# Altium PCB ESP32DOWDQ6.PcbDoc (part 2 of 2)
Units mm, origin at the board's own origin, x right, y up, seen from the top; angles counter-clockwise.
Board outline 70 x 35 mm, 2 copper layers (Top Layer, Bottom Layer); 86 components, 85 nets, 513 pads, 4 vias.
Unrouted connection lines stored in the file: 70.
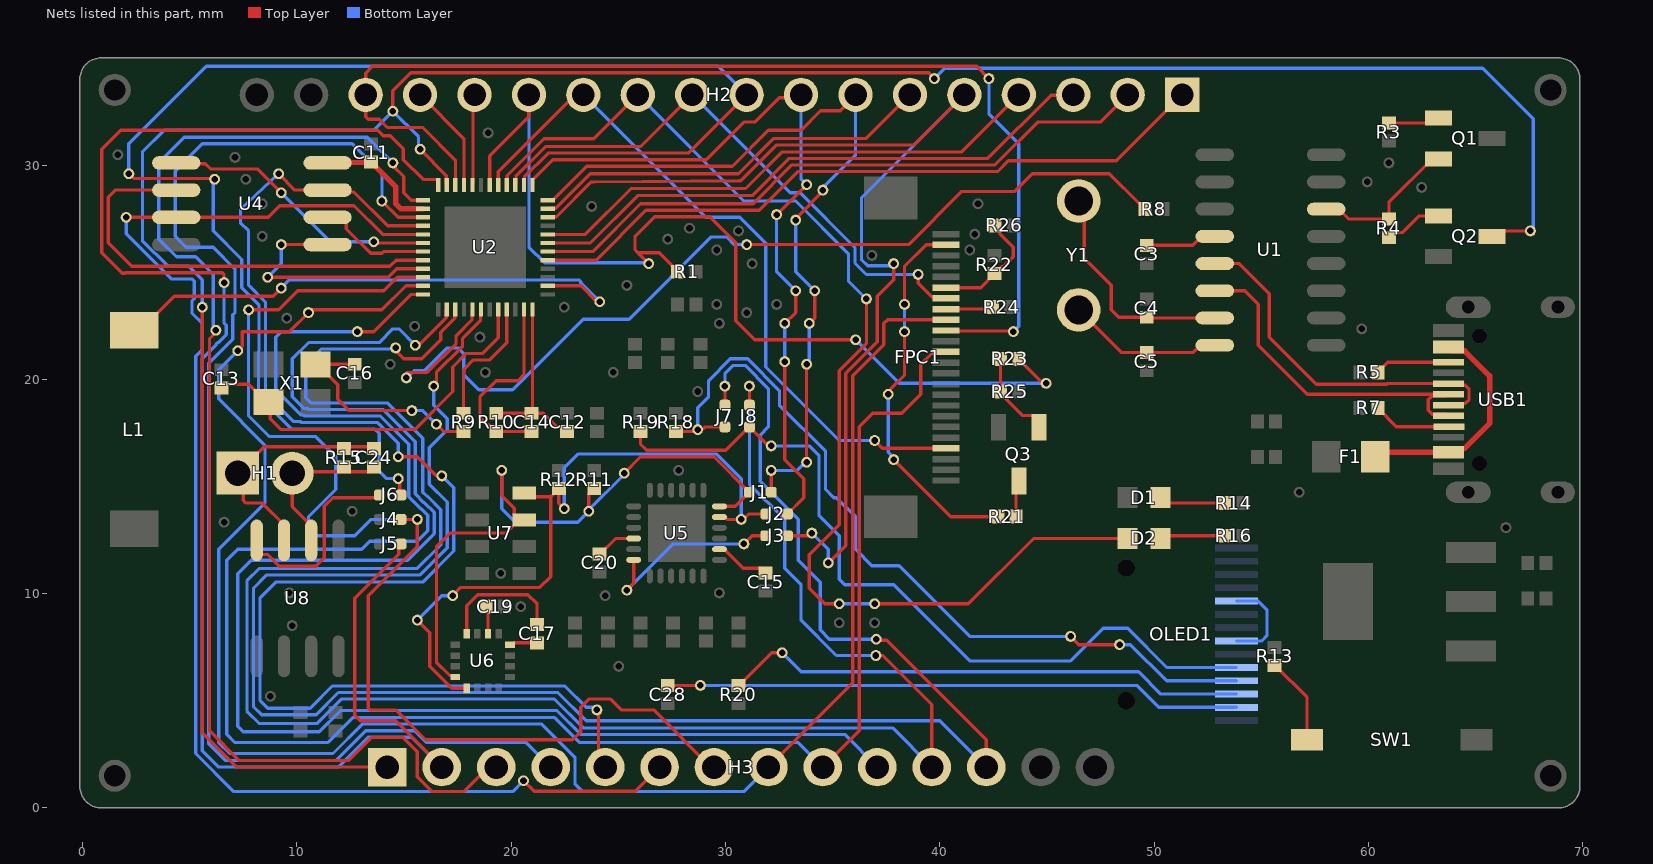
[diagram p2: the nets of this part, all layers, seen from the top]

## Via types
v1: diameter 0.61, hole 0.305, Top Layer to Bottom Layer, tented both sides, 4 vias

## Nets (pads, with @x,y where several pads share a name; then routed paths per layer and width w, separated by ;. In a path a pad name is that pad's centre, name@x,y a point inside that pad or via, vN(x,y) a via of type N, cw(c..) or ccw(c..) an arc to the next point about the centre after c; other vN are vias at no path point) (continued)
GPIO0: H3.1 pad.161 pad.183 pad.192 pad.205 pad.206 Q2.3 U2.23 | length 117.9
  Top Layer w0.152: pad.183@5.588,23.368 5.588,3.506 7.189,1.905 H3.1@14.224,1.905 ; pad.205@14.478,32.512 14.478,33.459 15.322,34.303 39.484,34.303 pad.206@39.624,34.163 ; pad.161@15.748,30.734 16.972,29.51 16.972,29.093 U2.23@16.996,29.07 ; Q2.3@65.766,26.67 66.02,26.924 pad.192@67.564,26.924
  Bottom Layer w0.152: pad.183@5.588,23.368 5.588,24.638 4.953,25.273 3.987,25.273 2.794,26.466 2.794,30.607 3.81,31.623 13.589,31.623 14.452,32.486 pad.205@14.478,32.512 15.68,31.31 15.68,30.802 pad.161@15.748,30.734 ; pad.206@39.751,34.036 40.234,34.519 65.329,34.519 67.691,32.156 67.691,27.051 pad.192@67.564,26.924
GPIO2: FPC1.10 H2.16 pad.193 pad.194 U2.22 | length 53.3
  Top Layer w0.152: U2.22@17.396,29.07 17.396,30.229 15.875,31.75 14.224,31.75 13.843,32.131 13.335,32.131 13.208,32.258 H2.16@13.208,33.274 13.208,34.29 13.525,34.607 41.72,34.607 pad.193@42.291,34.036 ; FPC1.10@40.294,22.279 40.321,22.252 43.407,22.252 pad.194@43.434,22.225
  Bottom Layer w0.152: pad.193@42.291,34.036 42.291,32.385 43.688,30.988 43.688,22.479 pad.194@43.434,22.225
GPIO4: H3.2 J5.2 pad.187 U2.24 | length 77.9
  Top Layer w0.152: pad.187@6.604,24.511 6.604,24.879 6.515,24.968 1.981,24.968 1.968,24.955 1.842,24.955 0.889,25.908 0.889,30.734 1.778,31.623 13.775,31.623 14.029,31.369 14.351,31.369 14.961,30.759 14.961,30.251 15.886,29.326 16.572,29.326 16.596,29.302 U2.24@16.596,29.07 ; J5.2@14.859,12.319 14.757,12.217 14.757,11.836 12.7,9.779 12.7,4.318 12.954,4.064 14.619,4.064 16.764,1.919 H3.2@16.764,1.905
  Bottom Layer w0.152: pad.187@6.604,24.511 6.604,22.627 6.706,22.525 6.706,22.089 6.334,21.717 6.312,21.717 6.223,21.628 6.223,21.59 5.588,20.955 5.588,2.667 6.35,1.905 11.938,1.905 13.335,3.302 15.367,3.302 H3.2@16.764,1.905
GPIO5: H3.7 J4.2 pad.200 pad.201 U2.34 | length 58
  Top Layer w0.152: pad.200@7.747,23.241 9.144,23.241 10.033,24.13 14.058,24.13 14.69,24.762 U2.34@15.888,24.762 ; J4.2@14.859,13.462 pad.201@15.621,13.462 15.621,12.192 13.335,9.906 13.335,4.661 13.424,4.572 14.605,4.572 16.002,3.175 22.86,3.175 23.241,3.556 23.241,4.699 23.622,5.08 24.638,5.08 25.146,4.572 26.65,4.572 29.317,1.905 H3.7@29.464,1.905
  Bottom Layer w0.152: pad.200@7.747,23.241 7.747,18.288 8.7,17.335 10.858,17.335 11.811,16.383 11.811,14.859 10.541,13.589 10.541,13.081 10.922,12.7 12.7,12.7 13.462,13.462 pad.201@15.621,13.462
GPIO9: H3.5 pad.167 pad.209 pad.210 pad.211 U2.28 U4.7 | length 67.5
  Top Layer w0.152: pad.167@9.144,29.591 9.906,28.829 U4.7@11.43,28.829 11.521,28.738 12.664,28.738 14.24,27.162 U2.28@15.888,27.162 ; pad.209@14.732,16.383 15.621,16.383 pad.210@16.51,15.494 ; pad.211@24.003,4.572 24.071,4.504 24.071,2.218 H3.5@24.384,1.905
  Bottom Layer w0.152: pad.167@9.144,29.591 7.366,27.94 7.366,27.305 7.747,26.924 7.747,24.387 8.534,23.599 8.534,19.329 9.83,18.034 10.16,18.034 10.211,17.983 13.764,17.983 14.667,17.08 14.732,17.015 pad.209@14.732,16.383 ; pad.210@16.764,15.494 17.323,14.935 17.323,11.989 15.875,10.541 9.017,10.541 8.28,9.804 8.28,5.007 8.64,4.648 10.617,4.648 11.659,5.69 22.504,5.69 23.495,4.699 23.876,4.699 pad.211@24.003,4.572 pad.211@24.13,4.445
GPIO10: H3.6 pad.212 pad.213 U2.29 U4.3 | length 65.2
  Top Layer w0.152: pad.212@2.032,27.559 U4.3@4.37,27.559 8.661,27.559 9.205,28.103 12.664,28.103 14.005,26.762 U2.29@15.888,26.762 ; pad.213@20.574,1.27 21.068,0.776 25.795,0.776 H3.6@26.924,1.905
  Bottom Layer w0.152: pad.212@2.032,27.559 2.032,26.797 4.153,24.676 5.118,24.676 5.207,24.587 5.207,23.763 5.105,23.662 5.105,23.089 5.588,22.606 5.588,21.386 5.283,21.081 5.283,2.54 7.061,0.762 20.066,0.762 pad.213@20.574,1.27
GPIO12: H2.13 pad.196 pad.242 pad.243 R1.2 R23.1 U2.18 | length 48.4
  Top Layer w0.152: U2.18@18.996,29.07 18.996,30.426 20.815,32.245 20.815,33.261 H2.13@20.828,33.274 ; pad.196@26.416,25.4 25.908,25.908 ; R1.2@27.769,25.019 27.769,25.044 26.905,25.908 25.908,25.908 ; pad.243@36.068,21.844 31.369,21.844 30.48,22.733 30.48,26.369 29.264,27.584 26.695,27.584 25.781,26.67 25.781,26.035 25.908,25.908 ; R23.1@43.688,20.955 43.688,20.93 44.806,19.812 pad.242@44.958,19.812
  Bottom Layer w0.152: H2.13@20.828,33.274 20.828,26.162 21.556,25.434 26.382,25.434 pad.196@26.416,25.4 ; pad.243@36.068,21.844 38.1,19.812 pad.242@44.958,19.812
GPIO13: H2.14 U2.20 | length 4.2
  Top Layer w0.152: U2.20@18.196,29.07 18.22,29.093 18.22,33.206 H2.14@18.288,33.274
GPIO14: FPC1.21 H2.12 pad.241 U2.17 | length 33.2
  Top Layer w0.152: U2.17@19.396,29.07 19.396,29.683 22.987,33.274 H2.12@23.368,33.274 ; pad.241@36.957,17.145 37.323,16.779 FPC1.21@40.294,16.779
  Bottom Layer w0.152: H2.12@23.368,33.274 29.083,27.559 30.67,27.559 31.877,26.352 31.877,20.574 35.306,17.145 pad.241@36.957,17.145
GPIO15: H2.15 U2.21 | length 5.1
  Top Layer w0.152: H2.15@15.748,33.274 17.796,31.226 U2.21@17.796,29.07
GPIO16: H3.3 pad.159 pad.186 U2.25 | length 59.4
  Top Layer w0.152: pad.186@6.223,22.288 6.223,22.205 5.923,21.906 5.923,17.953 5.923,3.602 7.315,2.21 12.406,2.21 13.48,3.284 14.968,3.284 15.621,2.631 15.621,1.452 16.311,0.762 17.78,0.762 18.923,1.905 H3.3@19.304,1.905 ; pad.159@14.478,30.099 14.478,29.972 14.986,29.464 14.986,28.702 15.326,28.362 U2.25@15.888,28.362
  Bottom Layer w0.152: pad.186@6.223,22.288 6.223,22.352 6.096,22.479 6.096,24.892 5.271,25.717 4.382,25.717 3.556,26.543 3.556,30.099 4.75,31.293 13.284,31.293 pad.159@14.478,30.099
GPIO17: H3.4 pad.166 U2.27 | length 60.9
  Top Layer w0.152: pad.166@13.97,28.321 14.729,27.562 U2.27@15.888,27.562
  Bottom Layer w0.152: pad.166@13.97,28.321 13.97,29.591 12.573,30.988 5.588,30.988 4.318,29.718 4.318,26.67 4.826,26.162 6.096,26.162 7.112,25.146 7.112,23.114 7.01,23.012 7.01,21.869 5.893,20.752 5.893,2.997 6.68,2.21 11.811,2.21 13.208,3.607 15.493,3.607 16.052,3.048 20.701,3.048 H3.4@21.844,1.905
GPIO18: FPC1.9 H3.8 pad.180 pad.208 U2.35 | length 85.6
  Top Layer w0.152: pad.208@7.239,21.336 7.455,21.552 7.455,22.225 9.652,22.225 pad.180@10.541,23.114 10.668,23.241 13.97,23.241 15.091,24.362 U2.35@15.888,24.362 ; H3.8@32.004,1.905 35.936,5.837 35.936,20.167 37.389,21.62 37.389,22.606 37.562,22.779 FPC1.9@40.294,22.779
  Bottom Layer w0.152: pad.208@7.239,21.336 6.35,20.447 6.35,19.088 8.509,16.929 8.509,14.224 6.35,12.065 6.35,3.048 6.858,2.54 11.684,2.54 13.056,3.912 21.433,3.912 22.973,2.372 22.973,1.129 23.339,0.762 30.861,0.762 H3.8@32.004,1.905
GPIO19: H3.10 pad.177 U2.38 | length 70.7
  Top Layer w0.152: pad.177@15.367,21.59 pad.177@15.527,21.59 15.687,21.59 16.972,22.875 16.972,23.231 U2.38@16.996,23.254
  Bottom Layer w0.152: pad.177@15.527,21.59 14.765,22.352 14.478,22.352 13.843,21.717 10.541,21.717 9.779,20.955 9.779,19.177 10.312,18.644 10.479,18.644 10.529,18.593 14.017,18.593 15.519,17.09 15.519,14.657 15.927,14.249 15.947,14.249 16.408,13.788 16.408,12.802 15.163,11.557 7.874,11.557 7.239,10.922 7.239,3.81 7.493,3.556 11.049,3.556 12.039,4.546 22.124,4.546 23.241,3.429 35.56,3.429 H3.10@37.084,1.905
GPIO21: H3.12 J7.2 pad.174 pad.277 pad.278 U2.42 | length 92.4
  Top Layer w0.152: pad.174@16.383,19.685 16.51,19.812 16.51,20.32 17.732,21.542 17.732,21.91 18.572,22.751 18.572,23.231 U2.42@18.596,23.254 ; J7.2@29.972,18.796 pad.278@29.972,19.685 ; pad.277@37.036,7.874 37.09,7.82 37.519,7.82 42.164,3.175 H3.12@42.164,1.905
  Bottom Layer w0.152: pad.174@16.383,19.685 16.383,18.796 17.018,18.161 17.018,17.653 16.18,16.815 16.18,15.113 17.018,14.275 17.018,12.142 15.747,10.871 8.598,10.871 7.976,10.249 7.976,4.724 8.357,4.343 10.897,4.343 11.939,5.385 22.174,5.385 23.495,4.064 40.005,4.064 H3.12@42.164,1.905 ; pad.278@29.972,19.685 29.972,20.27 30.352,20.65 30.912,20.65 32.004,19.558 32.004,17.78 31.623,17.399 31.623,15.367 31.623,15.24 33.401,13.462 33.401,11.557 34.417,10.541 34.417,8.305 34.848,7.874 pad.277@37.036,7.874
GPIO22: H3.11 J8.2 pad.178 pad.276 pad.279 U2.39 | length 95
  Top Layer w0.152: 14.732,21.209 14.986,20.955 15.825,20.955 16.717,21.847 16.717,22.189 17.372,22.844 17.372,23.231 U2.39@17.396,23.254 ; J8.2@31.115,18.796 pad.279@31.115,19.685 ; pad.276@37.02,7.112 37.338,7.112 39.624,4.826 H3.11@39.624,1.905
  Bottom Layer w0.152: pad.178@14.605,21.463 14.554,21.412 11.125,21.412 10.414,20.701 10.414,19.139 10.656,18.898 14.224,18.898 15.875,17.247 15.875,14.732 16.053,14.554 16.073,14.554 16.713,13.914 16.713,12.268 15.621,11.176 8.255,11.176 7.671,10.592 7.671,4.521 8.255,3.937 10.922,3.937 12.065,5.08 22.021,5.08 23.367,3.734 37.795,3.734 H3.11@39.624,1.905 ; pad.279@31.115,19.685 31.115,15.113 32.766,13.462 32.766,11.176 33.528,10.414 33.528,8.763 35.179,7.112 pad.276@37.02,7.112
GPIO23: FPC1.12 H3.9 pad.179 U2.36 | length 92.2
  Top Layer w0.152: pad.179@12.827,22.225 13.589,22.225 15.326,23.962 U2.36@15.888,23.962 ; H3.9@34.544,1.905 36.24,3.601 36.24,17.78 36.875,18.415 38.227,18.415 39.116,19.304 39.116,20.699 39.622,21.205 40.22,21.205 FPC1.12@40.294,21.279
  Bottom Layer w0.152: pad.179@12.827,22.225 9.271,22.225 9.017,21.971 9.017,19.508 10.186,18.339 10.286,18.339 10.337,18.288 13.89,18.288 15.215,16.964 15.215,14.53 15.8,13.945 15.821,13.945 16.104,13.662 16.104,12.929 15.621,12.446 13.399,12.446 13.018,12.065 7.239,12.065 6.731,11.557 6.731,3.429 7.112,3.048 11.43,3.048 12.598,4.216 22.023,4.216 23.191,3.048 33.401,3.048 H3.9@34.544,1.905
GPIO25: H2.9 J6.2 pad.202 pad.204 pad.291 U2.14 | length 69.7
  Top Layer w0.152: pad.204@2.159,29.591 2.377,29.373 6.124,29.373 pad.291@6.159,29.337 ; pad.202@14.732,15.367 14.795,15.303 14.795,14.668 J6.2@14.859,14.605 ; U2.14@20.596,29.07 20.62,29.093 20.62,29.449 21.727,30.556 28.27,30.556 H2.9@30.988,33.274
  Bottom Layer w0.152: pad.204@2.159,29.591 2.159,30.988 5.778,34.607 29.655,34.607 H2.9@30.988,33.274 ; pad.291@6.159,29.337 6.096,29.273 6.096,26.924 7.429,25.59 7.429,24.273 8.23,23.473 8.23,21.322 8.204,21.297 8.204,19.229 9.754,17.678 13.638,17.678 13.843,17.473 13.843,15.71 14.186,15.367 pad.202@14.732,15.367
GPIO26: FPC1.7 H2.10 pad.199 U2.15 | length 26.7
  Top Layer w0.152: U2.15@20.196,29.07 20.22,29.093 20.22,29.48 21.601,30.861 26.035,30.861 H2.10@28.448,33.274 ; pad.199@38.989,24.892 38.989,24.486 39.622,23.853 40.22,23.853 FPC1.7@40.294,23.779
  Bottom Layer w0.152: H2.10@28.448,33.274 33.02,28.702 33.481,28.702 36.043,26.14 36.043,25.425 36.576,24.892 pad.199@38.989,24.892
GPIO27: D2.K H2.11 pad.244 pad.245 pad.246 U2.16 | length 54.5
  Top Layer w0.152: U2.16@19.796,29.07 19.82,29.093 19.82,29.511 21.532,31.223 23.857,31.223 H2.11@25.908,33.274 ; pad.245@35.306,9.525 34.633,9.525 33.909,10.249 33.909,11.811 35.306,13.208 35.306,20.4 36.576,21.67 pad.246@36.576,23.749 ; pad.244@36.957,9.525 41.327,9.525 44.375,12.573 D2.K@48.752,12.573
  Bottom Layer w0.152: H2.11@25.908,33.274 30.861,28.321 33.274,28.321 35.738,25.857 35.738,24.587 pad.246@36.576,23.749 ; pad.245@35.306,9.525 pad.244@36.957,9.525
GPIO32: H2.7 J1.2 pad.233 pad.235 pad.258 pad.259 pad.260 pad.261 pad.262 U2.12 | length 38.1
  Top Layer w0.152: U2.12@21.704,28.362 21.936,28.362 23.521,29.947 30.328,29.947 32.004,31.623 33.528,31.623 34.434,32.529 35.358,32.529 36.068,33.239 H2.7@36.068,33.274 ; J1.2@32.131,14.732 pad.262@32.131,15.748 ; pad.235@33.274,27.432 33.274,27.495 34.544,28.765 pad.233@34.544,28.829 ; pad.261@33.782,16.129 pad.260@33.782,20.701 ; pad.259@33.909,22.606 34.163,22.86 pad.258@34.163,24.13
  Bottom Layer w0.152: pad.262@32.131,15.748 33.344,15.748 33.725,16.129 pad.261@33.782,16.129 ; pad.235@33.274,27.432 33.274,25.019 pad.258@34.163,24.13 ; pad.260@33.782,20.701 33.909,20.828 pad.259@33.909,22.606 ; pad.233@34.417,28.829 36.068,30.48 H2.7@36.068,33.274
GPIO33: H2.8 J2.2 pad.232 pad.234 pad.255 pad.256 pad.257 U2.13 | length 35.9
  Top Layer w0.152: U2.13@20.996,29.07 20.996,29.302 21.945,30.251 29.108,30.251 30.861,32.004 31.364,32.004 32.499,33.14 33.394,33.14 H2.8@33.528,33.274 ; pad.234@32.385,27.686 pad.232@33.782,29.083 ; pad.257@32.766,20.828 32.766,16.256 33.655,15.367 33.655,14.478 J2.2@32.893,13.716 ; pad.256@32.766,22.606 33.274,23.114 pad.255@33.274,24.13
  Bottom Layer w0.152: pad.234@32.385,27.686 32.385,25.019 pad.255@33.274,24.13 ; pad.257@32.766,20.828 pad.256@32.766,22.606 ; H2.8@33.528,33.274 33.528,29.337 pad.232@33.782,29.083
GPIO34: H2.5 J3.2 pad.263 pad.264 pad.265 U2.10 | length 51.1
  Top Layer w0.152: U2.10@21.704,27.562 21.727,27.586 22.114,27.586 23.738,29.21 23.876,29.21 30.607,29.264 30.712,29.264 32.385,30.937 38.811,30.937 H2.5@41.148,33.274 ; J3.2@32.893,12.7 33.813,12.7 33.94,12.827 pad.265@34.036,12.827 ; pad.264@34.925,11.557 35.611,12.243 35.611,20.273 37.084,21.746 37.084,23.876 37.846,24.638 pad.263@37.846,25.4
  Bottom Layer w0.152: pad.265@34.036,12.827 34.798,12.065 pad.264@34.798,11.43 ; pad.263@37.846,25.4 37.744,25.298 36.63,25.298 36.347,25.581 36.347,28.473 H2.5@41.148,33.274
GPIO35: H2.6 U2.11 | length 19.1
  Top Layer w0.152: U2.11@21.704,27.962 21.727,27.986 22.083,27.986 23.688,29.591 30.607,29.591 32.258,31.242 36.576,31.242 H2.6@38.608,33.274
GPIO37: H2.2 U2.6 | length 30.1
  Top Layer w0.152: U2.6@21.704,25.962 23.803,25.962 26.035,28.194 31.292,28.194 33.1,30.002 42.575,30.002 44.577,32.004 47.498,32.004 H2.2@48.768,33.274
GPIO38: H2.3 U2.7 | length 27.4
  Top Layer w0.152: U2.7@21.704,26.362 23.695,26.362 25.908,28.575 31.242,28.575 32.974,30.307 42.245,30.307 45.199,33.261 46.215,33.261 H2.3@46.228,33.274
IMUINT: J3.1 pad.238 pad.239 U5.12 | length 9.1
  Top Layer w0.152: pad.239@25.4,10.16 25.718,10.478 U5.12@25.718,11.573 ; pad.238@30.861,12.319 31.242,12.7 J3.1@31.877,12.7
  Bottom Layer w0.152: pad.239@25.4,10.16 27.559,12.319 pad.238@30.861,12.319
IMUSCL: J2.1 pad.215 pad.216 pad.220 pad.237 R12.2 U5.23 U6.1 U7.8 | length 33.1
  Top Layer w0.152: pad.215@15.621,8.763 16.205,8.179 16.205,6.6 17.222,5.583 U6.1@17.92,5.583 ; pad.216@17.272,9.906 17.653,10.287 21.336,10.287 21.844,10.795 21.844,14.517 ; U7.8@20.615,14.692 20.79,14.517 21.844,14.517 ; pad.220@22.479,13.97 22.225,14.224 R12.2@22.225,14.898 22.2,14.898 21.976,14.674 21.976,14.649 21.844,14.517 ; U5.23@29.718,13.573 29.963,13.573 30.074,13.462 pad.237@30.734,13.462 30.83,13.462 31.084,13.716 J2.1@31.877,13.716
  Bottom Layer w0.152: pad.215@15.621,8.763 16.764,9.906 pad.216@17.018,9.906 ; pad.220@22.479,13.97 22.479,15.875 23.114,16.51 29.591,16.51 30.734,15.367 pad.237@30.734,13.462
IMUSDA: J1.1 pad.218 pad.219 pad.236 R11.2 U5.24 U6.16 U7.7 | length 32.3
  Top Layer w0.152: U6.16@17.394,6.11 17.32,6.184 17.122,6.184 16.51,6.796 16.51,12.192 17.145,12.827 19.75,12.827 U7.7@20.365,13.442 ; pad.218@19.558,15.748 19.558,14.576 20.141,13.993 20.141,13.666 U7.7@20.365,13.442 ; U7.7@20.615,13.442 U7.7@20.365,13.442 ; pad.219@23.622,13.843 23.622,14.669 23.851,14.898 R11.2@23.876,14.898 ; pad.236@25.273,15.621 26.035,16.383 29.464,16.383 J1.1@31.115,14.732 30.456,14.073 U5.24@29.718,14.073
  Bottom Layer w0.152: pad.218@19.558,15.748 19.558,13.97 20.193,13.335 23.114,13.335 pad.219@23.622,13.843 23.622,13.906 25.273,15.557 pad.236@25.273,15.621
LCD_CS: FPC1.8 R24.2 | length 2.2
  Top Layer w0.152: FPC1.8@40.294,23.279 42.368,23.279 R24.2@42.457,23.368
LEDK: FPC1.2 pad.266 pad.267 pad.268 pad.269 R21.2 | length 17.5
  Top Layer w0.152: 37.719,19.558 38.354,20.193 pad.267@38.354,22.225 ; pad.269@37.846,16.256 40.513,13.589 R21.2@42.711,13.589 ; pad.266@38.354,23.495 38.354,25.273 39.36,26.279 FPC1.2@40.294,26.279
  Bottom Layer w0.152: pad.268@37.592,19.304 37.592,16.606 37.846,16.352 pad.269@37.846,16.256 ; pad.267@38.354,22.225 pad.266@38.354,23.495
NetC3_1: C3.1 U1.4 | length 3.3
  Top Layer w0.152: C3.1@49.657,26.25 51.812,26.25 52.232,26.67 U1.4@52.832,26.67
NetC4_2: C4.2 U1.7 Y1.1 | length 10.7
  Top Layer w0.152: Y1.1@46.482,28.321 46.736,28.067 46.736,25.654 48.006,24.384 48.006,23.241 48.348,22.899 C4.2@49.657,22.899 49.696,22.86 U1.7@52.832,22.86
NetC5_2: C5.2 U1.8 Y1.2 | length 7.3
  Top Layer w0.152: Y1.2@46.482,23.241 48.47,21.253 C5.2@49.657,21.253 51.821,21.253 52.158,21.59 U1.8@52.832,21.59
NetC12_1: C12.1 C14.1 R10.2 U2.48 | length 8.5
  Top Layer w0.152: R10.2@19.304,18.415 C14.1@20.955,18.415 ; U2.48@20.996,23.254 20.996,18.456 C14.1@20.955,18.415 ; C12.1@22.581,17.565 C12.1@22.606,17.565 22.382,17.789 22.135,17.789 21.509,18.415 C14.1@20.955,18.415
NetC13_2: C13.2 U2.44 X1.1 | length 18
  Top Layer w0.152: C13.2@6.477,19.768 7.748,19.768 8.579,18.937 X1.1@8.679,18.937 8.763,18.853 8.763,18.161 9.271,17.653 15.494,17.653 17.272,19.431 17.272,20.574 17.907,21.209 18.669,21.209 19.396,21.936 U2.44@19.396,23.254
NetC14_2: C14.2 R10.1 U2.47 | length 9.2
  Top Layer w0.152: U2.47@20.596,23.254 20.596,20.215 20.32,19.939 19.304,19.939 18.542,19.177 18.542,18.229 18.884,17.886 18.958,17.886 19.279,17.565 R10.1@19.304,17.565 C14.2@20.955,17.565
NetC15_1: C15.1 U5.20 | length 2.6
  Top Layer w0.152: U5.20@29.718,12.073 29.949,12.073 30.832,11.19 31.653,11.19 C15.1@31.877,10.966
NetC16_2: C16.2 pad.172 pad.173 R9.1 X1.3 | length 10.2
  Top Layer w0.152: C16.2@12.7,20.701 10.893,20.701 X1.3@10.879,20.687 10.979,20.687 11.911,19.755 11.911,19.077 12.446,18.542 pad.173@15.367,18.542 ; pad.172@16.51,17.907 16.852,17.565 R9.1@17.78,17.565
  Bottom Layer w0.152: 15.621,18.542 15.875,18.542 pad.172@16.51,17.907
NetC17_1: C17.1 U6.12 | length 6
  Top Layer w0.152: U6.12@17.92,8.133 17.92,9.432 18.44,9.952 20.782,9.952 21.209,9.525 C17.1@21.209,8.553
NetC17_2: C17.2 U6.8 | length 1.3
  Top Layer w0.152: U6.8@19.944,7.61 20.019,7.61 20.112,7.703 C17.2@21.209,7.703
NetC19_2: C19.2 U6.10 | length 1.3
  Top Layer w0.152: C19.2@18.835,9.398 18.919,9.314 U6.10@18.919,8.133
NetC20_2: C20.2 U5.10 | length 1.9
  Top Layer w0.152: C20.2@24.13,11.855 24.155,11.855 24.873,12.573 U5.10@25.718,12.573
NetC24_1: C24.1 H1.2 R15.1 U8.6 | length 7.6
  Top Layer w0.152: U8.6@10.668,12.484 10.668,13.175 9.779,14.064 H1.2@9.779,15.621 9.848,15.69 13.365,15.69 C24.1@13.589,15.914 C24.1@13.716,15.914
NetC24_2: C24.2 H1.1 R15.2 U8.7 | length 11.4
  Top Layer w0.152: U8.7@9.398,12.484 9.398,13.208 8.382,14.224 7.62,14.224 7.493,14.351 7.493,15.367 H1.1@7.239,15.621 8.468,16.85 13.503,16.85 C24.2@13.589,16.764
NetC28_2: C28.2 OLED1.13 pad.271 | length 27
  Top Layer w0.152: C28.2@27.305,5.715 pad.271@28.829,5.715
  Bottom Layer w0.152: pad.271@28.829,5.715 49.187,5.715 50.209,4.692 OLED1.13@53.848,4.692
NetD1_A: D1.A R14.2 | length 3.1
  Top Layer w0.152: D1.A@50.292,14.478 50.546,14.224 R14.2@53.296,14.224
NetD2_A: D2.A R16.2 | length 3.1
  Top Layer w0.152: D2.A@50.292,12.573 50.419,12.7 R16.2@53.296,12.7
NetFPC1_6: FPC1.6 R22.1 R26.2 | length 5.5
  Top Layer w0.152: FPC1.6@40.294,24.279 41.913,24.279 42.501,24.867 R22.1@42.501,24.892 ; R22.1@42.545,24.931 42.57,24.931 42.891,25.252 42.965,25.252 43.434,25.722 43.434,26.162 42.808,26.788 42.808,26.954 R26.2@42.584,27.178
NetL1_1: L1.1 pad.168 pad.182 U2.2 | length 25.9
  Top Layer w0.152: L1.1@2.413,22.283 2.692,22.283 4.285,23.876 8.89,23.876 pad.182@9.271,24.257 ; U2.2@21.704,24.362 23.263,24.362 24.003,23.622 pad.168@24.13,23.622
  Bottom Layer w0.152: pad.182@9.271,24.257 9.652,24.638 23.152,24.638 23.241,24.549 23.241,24.511 pad.168@24.13,23.622
NetOLED1_5: OLED1.5 OLED1.8 | length 4.3
  Bottom Layer w0.152: OLED1.8@53.848,7.792 55.036,7.792 55.267,8.023 55.267,9.249 54.864,9.652 OLED1.5@53.848,9.652
NetOLED1_12: OLED1.12 pad.270 R20.2 | length 24.7
  Top Layer w0.152: R20.2@30.607,5.715 30.632,5.715 32.156,7.239 pad.270@32.639,7.239
  Bottom Layer w0.152: pad.270@32.639,7.239 33.528,6.35 49.276,6.35 50.314,5.312 OLED1.12@53.848,5.312
NetQ1_1: Q1.1 R3.1 | length 2.4
  Top Layer w0.152: R3.1@60.96,31.965 63.039,31.965 Q1.1@63.266,32.192
NetQ2_1: Q2.1 R4.1 | length 2.7
  Top Layer w0.152: R4.1@60.96,26.626 61.184,26.85 61.578,26.85 62.348,27.62 Q2.1@63.266,27.62
NetQ3_1: Q3.1 R23.2 R25.2 | length 4.2
  Top Layer w0.152: R23.2@42.838,20.955 R25.2@42.838,19.431 43.062,19.207 43.062,19.109 43.862,18.309 44.364,18.309 44.638,18.035 Q3.1@44.638,17.76
NetQ3_3: Q3.3 R21.1 | length 1.7
  Top Layer w0.152: R21.1@43.561,13.589 43.561,15.133 Q3.3@43.688,15.26
NetR5_1: R5.1 USB1.B5 | length 3.5
  Top Layer w0.152: R5.1@60.452,20.32 60.452,20.345 60.907,20.8 USB1.B5@63.747,20.8
NetR7_1: R7.1 USB1.A5 | length 3.7
  Top Layer w0.152: R7.1@60.452,18.669 60.452,18.644 61.306,17.79 USB1.A5@63.762,17.79
NetR8_2: pad.175 pad.227 R8.2 U2.41 | length 46.1
  Top Layer w0.152: 15.113,20.32 16.079,20.32 17.427,21.668 17.427,22.036 18.172,22.782 18.172,23.231 U2.41@18.196,23.254 ; pad.227@30.988,26.289 38.543,26.289 41.02,28.765 43.497,28.765 44.323,29.591 47.918,29.591 49.32,28.189 49.345,28.189 49.569,27.965 R8.2@49.569,27.94
  Bottom Layer w0.152: pad.175@15.113,20.066 15.135,20.066 15.465,20.396 15.951,20.396 17.018,21.463 17.526,21.463 17.788,21.201 17.788,20.214 18.495,19.507 20.065,19.507 23.367,22.809 25.502,22.809 29.337,26.644 30.048,26.644 30.404,26.289 pad.227@30.734,26.289
NetR9_2: R9.2 U2.45 | length 6.1
  Top Layer w0.152: R9.2@17.78,18.415 17.78,20.447 18.237,20.904 18.999,20.904 19.796,21.701 U2.45@19.796,23.254
NetR13_1: R13.1 SW1.2 | length 4.1
  Top Layer w0.152: R13.1@55.626,6.643 55.651,6.643 57.137,5.157 SW1.2@57.137,3.175
OLED_SCL: J8.1 OLED1.10 pad.272 R19.2 | length 37.7
  Top Layer w0.152: R19.2@26.035,17.565 26.035,16.98 26.327,16.688 30.023,16.688 J8.1@31.115,17.78 32.004,16.891 pad.272@32.131,16.891
  Bottom Layer w0.152: pad.272@32.131,16.891 33.909,16.891 34.366,16.434 34.366,13.64 35.306,12.7 35.306,10.668 35.56,10.414 37.846,10.414 41.402,6.858 46.101,6.858 47.625,8.382 48.564,8.382 48.768,8.382 50.598,6.552 OLED1.10@53.848,6.552
OLED_SDA: J7.1 OLED1.11 pad.273 pad.274 pad.275 R18.2 | length 38.5
  Top Layer w0.152: R18.2@27.686,17.565 28.832,17.565 29.047,17.78 J7.1@29.972,17.78 ; pad.274@46.101,8.001 46.482,7.62 pad.273@48.387,7.62
  Bottom Layer w0.152: pad.275@28.702,17.653 28.702,18.669 29.21,19.177 29.21,19.939 30.226,20.955 31.038,20.955 32.518,19.475 32.518,18.79 34.671,16.637 34.671,14.859 35.052,14.478 35.179,14.478 36.068,13.589 36.068,12.065 36.83,11.303 38.1,11.303 41.402,8.001 pad.274@46.101,8.001 ; pad.273@48.387,7.62 48.895,7.62 50.583,5.932 OLED1.11@53.848,5.932
RTS: Q1.2 R4.2 U1.14 | length 7.1
  Top Layer w0.152: U1.14@58.032,27.94 58.632,27.94 59.096,27.476 R4.2@60.96,27.476 60.96,28.261 62.991,30.292 Q1.2@63.266,30.292
SD0: U2.32 U4.2 | length 20.7
  Top Layer w0.152: U4.2@4.37,28.829 1.524,28.829 1.194,28.499 1.194,26.365 2.286,25.273 14.339,25.273 14.628,25.562 U2.32@15.888,25.562
SD1: pad.163 pad.164 U2.33 U4.5 | length 11.4
  Top Layer w0.152: pad.163@8.636,24.765 14.262,24.765 14.659,25.162 U2.33@15.888,25.162 ; pad.164@9.271,26.289 U4.5@11.43,26.289
  Bottom Layer w0.152: pad.163@8.636,24.765 9.271,25.4 pad.164@9.271,26.289
SD_CLK: U2.31 U4.6 | length 5.4
  Top Layer w0.152: U4.6@11.43,27.559 12.086,27.559 12.307,27.338 12.307,27.015 13.438,25.884 13.967,25.884 14.045,25.962 U2.31@15.888,25.962
SD_CMD: pad.162 pad.165 U2.30 U4.1 | length 13.1
  Top Layer w0.152: U4.1@4.37,30.099 4.404,30.065 5.724,30.065 5.969,29.82 8.153,29.82 pad.165@9.271,28.702 ; pad.162@13.589,26.416 13.643,26.362 U2.30@15.888,26.362
  Bottom Layer w0.152: pad.165@9.271,28.702 11.557,26.416 pad.162@13.589,26.416
SENSOR_VN: H2.4 U2.8 | length 24.7
  Top Layer w0.152: U2.8@21.704,26.762 23.46,26.762 25.603,28.905 30.937,28.905 32.644,30.612 41.026,30.612 H2.4@43.688,33.274
SENSOR_VP: H2.1 U2.5 | length 32.8
  Top Layer w0.152: U2.5@21.704,25.562 23.962,25.562 26.289,27.889 31.572,27.889 33.376,29.693 36.369,29.693 36.374,29.698 42.702,29.698 43.205,30.201 48.235,30.201 H2.1@51.308,33.274
STB: J6.1 U8.8 | length 9.3
  Top Layer w0.152: U8.8@8.128,12.484 8.128,12.017 8.32,11.825 8.641,11.825 9.186,11.28 10.88,11.28 11.282,11.682 11.282,14.076 11.684,14.478 13.716,14.478 J6.1@13.843,14.605
USB-DN: U1.6 USB1.A7 USB1.B7 | length 16.7
  Top Layer w0.152: U1.6@52.832,24.13 54.229,24.13 54.864,23.495 54.864,21.59 57.154,19.3 USB1.A7@63.747,19.3 63.673,19.226 62.944,19.226 62.944,19.195 62.793,19.045 62.793,18.555 62.974,18.374 63.673,18.374 USB1.B7@63.747,18.3
USB-DP: U1.5 USB1.A6 USB1.B6 | length 17.1
  Top Layer w0.152: U1.5@52.832,25.4 53.975,25.4 55.372,24.003 55.372,21.971 57.577,19.766 60.847,19.766 60.88,19.8 USB1.B6@63.747,19.8 63.82,19.726 64.519,19.726 64.7,19.545 64.7,19.055 64.519,18.874 63.82,18.874 USB1.A6@63.747,18.8
VBUS: F1.1 USB1.A4B9 USB1.B4A9 | length 10.7
  Top Layer w0.254: F1.1@60.324,16.383 60.541,16.6 USB1.A4B9@63.747,16.6 63.92,16.773 64.49,16.773 65.659,17.942 65.659,20.158 64.49,21.327 63.92,21.327 USB1.B4A9@63.747,21.5
VDD_SDIO: C11.2 U2.26 U4.8 | length 5.9
  Top Layer w0.254: U4.8@11.43,30.099 11.449,30.118 13.442,30.118 C11.2@13.462,30.138 13.487,30.138 13.66,29.965 13.66,29.94 14.605,28.995 14.605,28.194 14.837,27.962 U2.26@15.888,27.962
pads on no net: FPC1.11 FPC1.22 FPC1.25 FPC1.26 OLED1. OLED1.1 OLED1.2 OLED1.3 OLED1.4 OLED1.6 OLED1.9 U1.9 U1.10 U1.11 U1.12 U1.15 U3.4 U5.0 U5.2 U5.3 U5.4 U5.5 U5.6 U5.7 U5.14 U5.15 U5.16 U5.17 U5.19 U5.21 U5.22 U6.3 U6.4 U6.5 U6.6 U6.7 U6.14 U6.15 U7.6 USB1. USB1.A8 USB1.B8

## Polygon pours and split planes (outlines as drawn)
GND on Bottom Layer "GND_L02_P000" (solid, pour order 0): -0.15,24.664 -0.061,24.575 4.968,24.575 4.968,10.605 4.93,10.567 4.803,10.694 -0.15,10.694 -0.15,0.899 ccw(c0.85,0.899) 0.85,-0.101 68.85,-0.101 ccw(c68.85,0.899) 69.85,0.899 69.85,33.899 ccw(c68.85,33.899) 68.85,34.899 0.85,34.899 ccw(c0.85,33.899) -0.15,33.899
GND on Top Layer "GND_L01_P002" (solid, pour order 2): -0.075,24.817 4.878,24.817 4.878,10.974 5.005,10.847 -0.075,10.847 -0.075,1.052 ccw(c0.925,1.052) 0.925,0.052 68.925,0.052 ccw(c68.925,1.052) 69.873,1.37 69.873,33.734 ccw(c68.925,34.052) 68.925,35.052 0.925,35.052 ccw(c0.925,34.052) -0.075,34.052

## Keep-outs
Keep-Out Layer:
  lines w0.254: 0,1 ccw(c1,1) 1,0 69,0 ccw(c69,1) 70,1 70,34 ccw(c69,34) 69,35 1,35 ccw(c1,34) 0,34 0,1

## Silkscreen, mask and mechanical layers (free items; w line width, h text height)
Top Overlay:
  lines w0.254: 0.127,24.765 4.572,24.765 5.08,24.765 5.08,12.319 5.08,10.795 ; 0.254,10.795 4.699,10.795 5.08,10.795 ; 5.08,11.557 5.08,10.795 ; 44.238,20.955 44.577,20.955 45.212,20.32
  text "GND" at 4.318,33.02 h0.76
  text "P38" at 45.212,31.242 h0.76
  text "GND" at 9.017,30.988 h0.76
  text "P2" at 11.43,30.988 h0.76
  text "VN" at 43.18,30.988 h0.76
  text "P37" at 47.879,30.988 h0.76
  text "VP" at 50.673,30.988 h0.76
  text "P15" at 14.605,30.861 h0.76
  text "P12" at 19.812,30.861 h0.76
  text "P14" at 22.479,30.861 h0.76
  text "P27" at 25.019,30.861 h0.76
  text "P26" at 27.432,30.861 h0.76
  text "P25" at 29.845,30.861 h0.76
  text "P33" at 32.385,30.861 h0.76
  text "P32" at 35.052,30.861 h0.76
  text "P35" at 37.592,30.861 h0.76
  text "P34" at 40.386,30.861 h0.76
  text "P13" at 17.272,30.734 h0.76
  text "P16" at 18.542,3.556 h0.76
  text "P17" at 20.955,3.556 h0.76
  text "P23" at 33.655,3.556 h0.76
  text "P19" at 36.322,3.556 h0.76
  text "P22" at 38.735,3.556 h0.76
  text "P21" at 41.402,3.556 h0.76
  text "3V3" at 43.561,3.556 h0.76
  text "5V" at 45.974,3.556 h0.76
  text "P0" at 13.716,3.429 h0.76
  text "P9" at 23.749,3.429 h0.76
  text "P10" at 25.781,3.429 h0.76
  text "P5" at 28.702,3.429 h0.76
  text "P18" at 31.242,3.429 h0.76
  text "P4" at 16.276,3.408 h0.76
Bottom Overlay:
  text "Designed By Tuubu" at 36.195,16.129 h1.52
Mechanical 1:
  lines w0.254: 0,1 ccw(c1,1) 1,0 69,0 ccw(c69,1) 70,1 70,34 ccw(c69,34) 69,35 1,35 ccw(c1,34) 0,34 0,1